# EAGLE board proto (EAGLE 5.12)
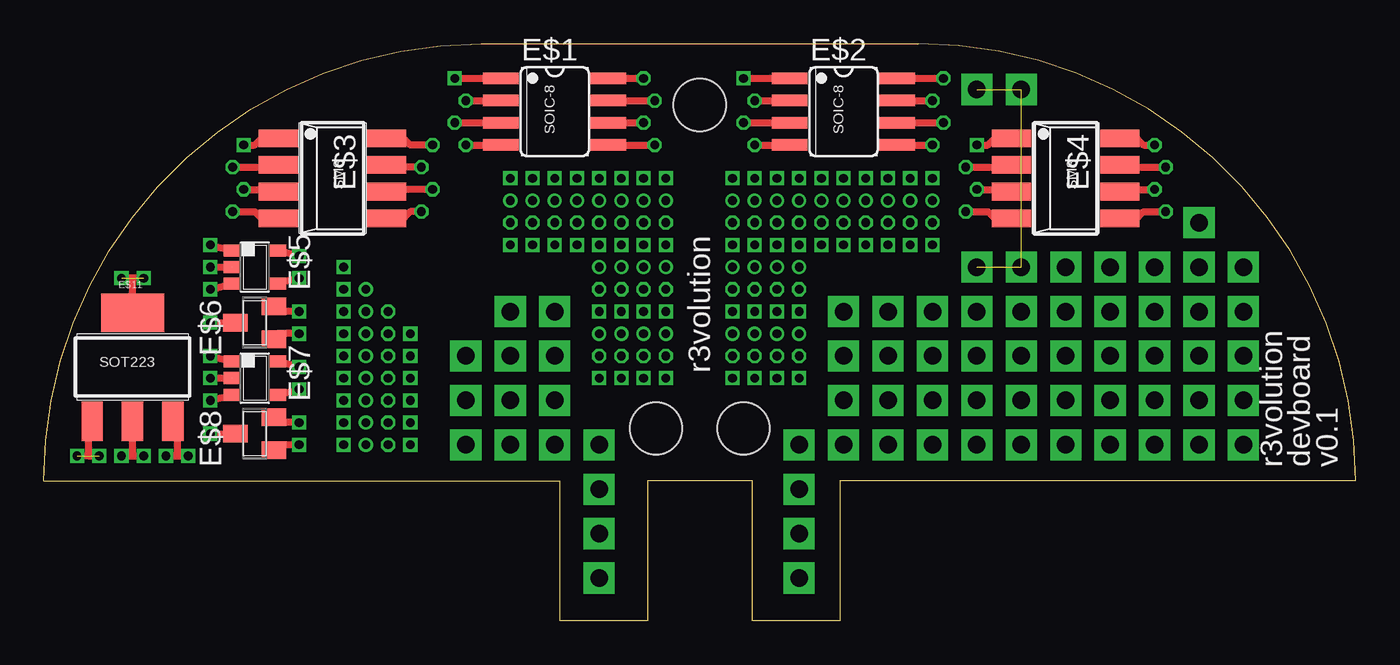
[diagram p0: board, top side]
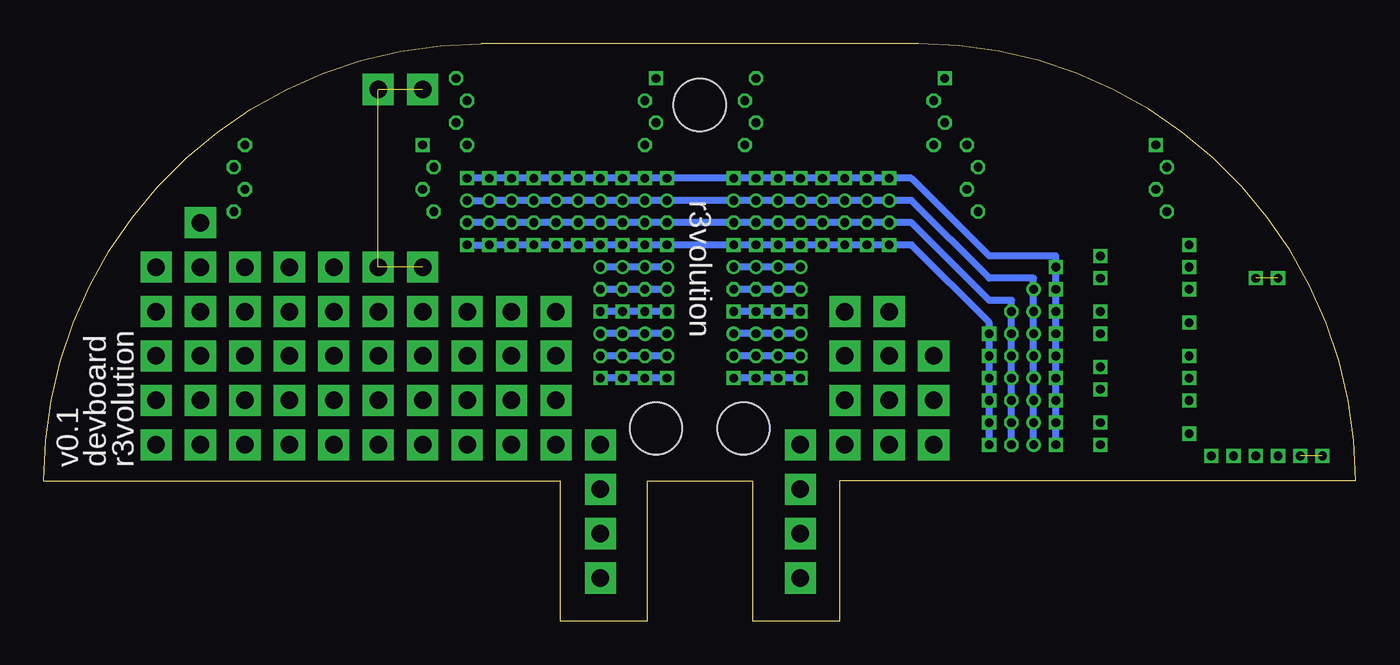
[diagram p1: board, bottom side, seen from below]

Size 75 x 33 mm. Coordinates in mm from the lower left corner, seen from the top.
Outline: 0,8 arc-90 25,33 50,33 arc-90 75,8 45.5,8 45.5,0 40.5,0 40.5,8 34.5,8 34.5,0 29.5,0 29.5,8 0,8
Copper layers (1*16): Top 0.035mm / dielectric 1.5mm / Bottom 0.035mm
Design rules "Seeed Fusion Design Rules": minimum track width 6mil, minimum drill 12mil, track to track 6mil, track to pad 6mil, pad to pad 6mil, via to via 6mil, smd to smd 0mil, copper to edge 10mil, drill to drill 10mil, minimum pad ring 10mil, minimum via ring 6mil, stop-mask expansion 2mil, vias tented up to drill 100mil, thermal gap 10mil
Holes 3 mm at 35,11 40,11 37.5,29.5

## Footprints (pad centres in the part's own frame; a part is rotated, then mirrored left to right if it is on the bottom)
SO08 = smd 0.66 x 2.032: 1 -1.905,-3.073; 2 -0.635,-3.073; 3 0.635,-3.073; 4 1.905,-3.073; 5 1.905,3.073; 6 0.635,3.073; 7 -0.635,3.073; 8 -1.905,3.073
SM8 = smd 1.016 x 2.235: 1 -2.286,-3.099; 2 -0.762,-3.099; 3 0.762,-3.099; 4 2.286,-3.099; 5 2.286,3.099; 6 0.762,3.099; 7 -0.762,3.099; 8 -2.286,3.099
DBV_R-PDSO-G5 = smd 0.69 x 0.99: 1 -0.95,-1.29; 2 0,-1.29; 3 0.95,-1.29; 4 0.95,1.3; 5 -0.95,1.3
SOT23 = smd 1 x 1.4: 1 -0.95,-1.1; 2 0.95,-1.1; 3 0,1.1
SOT223 = smd 1.219 x 2.235: 1 -2.311,-3.099; 2 0,-3.099; 3 2.311,-3.099 | smd 3.6 x 2.2: 4 0,3.099

## Placement (x,y rotation side)
E$1  [SO08]  29.21,29.11 270 top
E$2  [SO08]  45.72,29.11 270 top
E$3  [SM8]  16.51,25.3 270 top
E$4  [SM8]  58.42,25.3 270 top
E$5  [DBV_R-PDSO-G5]  12.06,20.23 270 top
E$6  [SOT23]  12.06,17.05 90 top
E$7  [DBV_R-PDSO-G5]  12.06,13.88 270 top
E$8  [SOT23]  12.06,10.7 90 top
E$11  [SOT223]  5.08,14.51 0 top

## Library data of the parts
E$1-E$4 = r3_parts
E$5 E$7 = 74xx-little-de
E$6 E$8 = transistor
E$11 = SparkFun

## Tracks (layer width: path | path; a pad name or v marks a point on that pad's centre or on a via)
S$1  (via drill 0.5)
  Top 0.406: v23.5,31.02 26.04,31.02
S$2  (via drill 0.5)
  Top 0.406: v24.13,29.75 26.04,29.75
S$3  (via drill 0.5)
  Top 0.406: v23.5,28.48 26.04,28.48
S$4  (via drill 0.5)
  Top 0.406: v24.13,27.21 26.04,27.21
S$5  (via drill 0.5)
  Top 0.406: 32.38,31.02 v34.29,31.02
S$6  (via drill 0.5)
  Top 0.406: 32.38,29.75 v34.92,29.75
S$7  (via drill 0.5)
  Top 0.406: 32.38,28.48 v34.29,28.48
S$8  (via drill 0.5)
  Top 0.406: 32.38,27.21 v34.92,27.21
S$9  (via drill 0.5)
  Top 0.406: v40.01,31.02 41.91,31.02
S$10  (via drill 0.5)
  Top 0.406: v40.64,29.75 41.91,29.75
S$11  (via drill 0.5)
  Top 0.406: v40.01,28.48 41.91,28.48
S$12  (via drill 0.5)
  Top 0.406: v40.64,27.21 41.91,27.21
S$13  (via drill 0.5)
  Top 0.406: 49.53,31.02 v51.44,31.02
S$14  (via drill 0.5)
  Top 0.406: 49.53,29.75 v50.8,29.75
S$15  (via drill 0.5)
  Top 0.406: 49.53,28.48 v51.44,28.48
S$16  (via drill 0.5)
  Top 0.406: 49.53,27.21 v50.8,27.21
S$17  (via drill 0.5)
  Top 0.406: v22.23,27.21 20.95,27.21 20.64,27.53
S$18  (via drill 0.5)
  Top 0.406: v21.59,25.94 20.32,25.94
S$19  (via drill 0.5)
  Top 0.406: v22.23,24.67 20.32,24.67
S$20  (via drill 0.5)
  Top 0.406: v21.59,23.4 20.95,23.4 20.64,23.08
S$21  (via drill 0.5)
  Top 0.406: v11.43,27.21 12.06,27.21 12.38,27.53
S$22  (via drill 0.5)
  Top 0.406: v10.79,25.94 13.34,25.94
S$23  (via drill 0.5)
  Top 0.406: v11.43,24.67 13.34,24.67
S$24  (via drill 0.5)
  Top 0.406: v10.79,23.4 12.06,23.4 12.38,23.08
S$25  (via drill 0.5)
  Top 0.406: v53.34,27.21 53.98,27.21 54.29,27.53
S$26  (via drill 0.5)
  Top 0.406: v52.7,25.94 54.61,25.94
S$27  (via drill 0.5)
  Top 0.406: v53.34,24.67 54.61,24.67
S$28  (via drill 0.5)
  Top 0.406: v52.7,23.4 53.98,23.4 54.29,23.08
S$29  (via drill 0.5)
  Top 0.406: v63.5,27.21 62.87,27.21 62.55,27.53
S$30  (via drill 0.5)
  Top 0.406: 62.23,25.94 v64.14,25.94
S$31  (via drill 0.5)
  Top 0.406: 62.23,24.67 v63.5,24.67
S$32  (via drill 0.5)
  Top 0.406: v64.14,23.4 62.87,23.4 62.55,23.08
S$33  (via drill 1 pad 1.78)
  other vias: 53.34,10.06
S$34  (via drill 1 pad 1.78)
  other vias: 53.34,12.61
S$35  (via drill 1 pad 1.78)
  other vias: 53.34,15.14
S$36  (via drill 1 pad 1.78)
  other vias: 53.34,17.68
S$37  (via drill 0.5)
  Bottom 0.406: v31.75,15.14 v33.02,15.14 v34.29,15.14 v35.56,15.14
S$38  (via drill 0.5)
  Top 0.406: 13.34,12.92 v14.61,13.24
S$39  (via drill 0.5)
  Top 0.406: v14.61,14.51 13.34,14.83
S$40  (via drill 0.5)
  Top 0.406: v9.53,15.14 10.79,14.83
S$41  (via drill 1 pad 1.78)
  other vias: 50.8,17.68
S$42  (via drill 0.5)
  Top 0.406: 5.08,11.34 5.08,9.43 v5.71,9.43 v4.45,9.43
S$43  (via drill 1 pad 1.78)
  other vias: 50.8,15.14
S$44  (via drill 1 pad 1.78)
  other vias: 50.8,12.61
S$45  (via drill 0.5)
  Top 0.406: v9.53,12.61 10.79,12.92
S$46  (via drill 0.5)
  Top 0.406: v9.53,13.88 10.79,13.88
S$47  (via drill 0.5)  (1 unrouted)
  Top 0.406: 5.08,18.32 5.08,19.59 v5.71,19.59 v4.45,19.59
S$48  (via drill 0.5)  (1 unrouted)
  Top 0.406: 2.54,11.34 2.54,9.43 v3.17,9.43 v1.91,9.43
S$49  (via drill 0.5)
  Top 0.406: 7.62,11.34 7.62,9.43 v6.99,9.43 v8.26,9.43
S$117  (via drill 0.5)
  Bottom 0.406: v17.14,10.06 v17.14,11.34 v17.14,12.61 v17.14,13.88 v17.14,15.14 v17.14,16.41 v17.14,20.23 17.14,20.86 20.95,20.86 25.4,25.3 v49.53,25.3 v50.8,25.3
S$118  (via drill 1 pad 1.78)
  other vias: 50.8,10.06
S$119  (via drill 1 pad 1.78)
  other vias: 48.26,10.06
S$120  (via drill 0.5)
  other vias: 26.67,22.77
S$121  (via drill 0.5)
  other vias: 27.94,22.77
S$122  (via drill 0.5)
  other vias: 29.21,22.77
S$123  (via drill 0.5)
  other vias: 30.48,22.77
S$124  (via drill 0.5)
  other vias: 31.75,22.77
S$125  (via drill 0.5)
  other vias: 33.02,22.77
S$126  (via drill 0.5)
  other vias: 34.29,22.77
S$127  (via drill 0.5)
  other vias: 35.56,22.77
S$129  (via drill 0.5)
  other vias: 26.67,24.04
S$130  (via drill 0.5)
  other vias: 26.67,25.3
S$131  (via drill 0.5)
  other vias: 27.94,25.3
S$132  (via drill 0.5)
  other vias: 27.94,24.04
S$133  (via drill 0.5)
  other vias: 29.21,24.04
S$134  (via drill 0.5)
  other vias: 29.21,25.3
S$135  (via drill 0.5)
  other vias: 30.48,25.3
S$136  (via drill 0.5)
  other vias: 30.48,24.04
S$137  (via drill 0.5)
  other vias: 31.75,24.04
S$138  (via drill 0.5)
  other vias: 31.75,25.3
S$139  (via drill 0.5)
  other vias: 33.02,25.3
S$140  (via drill 0.5)
  other vias: 33.02,24.04
S$141  (via drill 0.5)
  other vias: 34.29,25.3
S$142  (via drill 0.5)
  other vias: 34.29,24.04
S$143  (via drill 0.5)
  other vias: 35.56,25.3
S$144  (via drill 0.5)
  other vias: 35.56,24.04
S$150  (via drill 0.5)
  other vias: 39.37,25.3
S$151  (via drill 0.5)
  other vias: 39.37,24.04
S$152  (via drill 0.5)
  other vias: 39.37,22.77
S$153  (via drill 0.5)
  other vias: 40.64,25.3
S$154  (via drill 0.5)
  other vias: 40.64,24.04
S$155  (via drill 0.5)
  other vias: 40.64,22.77
S$156  (via drill 1 pad 1.78)
  other vias: 48.26,12.61
S$157  (via drill 0.5)
  Bottom 0.406: v18.41,10.06 v18.41,11.34 v18.41,12.61 v18.41,13.88 v18.41,15.14 v18.41,16.41 v18.41,18.95 18.41,19.59 20.95,19.59 25.4,24.04 v41.91,24.04 v49.53,24.04 v50.8,24.04
S$158  (via drill 0.5)
  other vias: 41.91,25.3
S$159  (via drill 0.5)
  other vias: 43.18,25.3
S$160  (via drill 0.5)
  other vias: 43.18,24.04
S$161  (via drill 0.5)
  other vias: 43.18,22.77
S$162  (via drill 0.5)
  other vias: 44.45,24.04
S$163  (via drill 0.5)
  other vias: 44.45,25.3
S$164  (via drill 0.5)
  other vias: 44.45,22.77
S$165  (via drill 0.5)
  other vias: 45.72,25.3
S$166  (via drill 0.5)
  other vias: 45.72,24.04
S$167  (via drill 0.5)
  other vias: 45.72,22.77
S$168  (via drill 0.5)
  other vias: 46.99,22.77
S$169  (via drill 0.5)
  other vias: 46.99,24.04
S$170  (via drill 0.5)
  other vias: 46.99,25.3
S$171  (via drill 0.5)
  other vias: 48.26,25.3
S$172  (via drill 1 pad 1.78)
  other vias: 48.26,15.14
S$179  (via drill 1 pad 1.78)
  other vias: 48.26,17.68
S$180  (via drill 0.5)
  other vias: 48.26,24.04
S$181  (via drill 0.5)
  other vias: 48.26,22.77
S$182  (via drill 0.5)
  Bottom 0.406: v19.68,10.06 v19.68,11.34 v19.68,12.61 v19.68,13.88 v19.68,15.14 v19.68,16.41 v19.68,17.68 19.68,18.32 20.95,18.32 25.4,22.77 v41.91,22.77 v49.53,22.77 v50.8,22.77
S$183  (via drill 0.5)
  Bottom 0.406: v31.75,20.23 v33.02,20.23 v34.29,20.23 v35.56,20.23
S$184  (via drill 0.5)
  Bottom 0.406: v31.75,18.95 v33.02,18.95 v34.29,18.95 v35.56,18.95
S$185  (via drill 0.5)
  Bottom 0.406: v31.75,17.68 v33.02,17.68 v34.29,17.68 v35.56,17.68
S$186  (via drill 0.5)
  Bottom 0.406: v31.75,16.41 v33.02,16.41 v34.29,16.41 v35.56,16.41
S$188  (via drill 0.5)
  Bottom 0.406: v31.75,13.88 v33.02,13.88 v34.29,13.88 v35.56,13.88
S$189  (via drill 1 pad 1.78)
  other vias: 45.72,17.68
S$190  (via drill 1 pad 1.78)
  other vias: 45.72,15.14
S$191  (via drill 1 pad 1.78)
  other vias: 45.72,12.61
S$192  (via drill 1 pad 1.78)
  other vias: 45.72,10.06
S$197  (via drill 0.5)
  Bottom 0.406: v20.95,10.06 v20.95,11.34 v20.95,12.61 v20.95,13.88 v20.95,15.14 v20.95,16.41 20.95,17.05 25.4,21.5 v49.53,21.5 v50.8,21.5
S$199  (via drill 0.5)
  Top 0.406: v14.61,19.59 13.34,19.27
S$200  (via drill 1 pad 1.78)
  other vias: 43.18,10.06
S$201  (via drill 1 pad 1.78)
  other vias: 43.18,7.53
S$202  (via drill 1 pad 1.78)
  other vias: 43.18,4.99
S$203  (via drill 1 pad 1.78)
  other vias: 43.18,2.45
S$206  (via drill 1 pad 1.78)
  other vias: 29.21,17.68
S$207  (via drill 1 pad 1.78)
  other vias: 29.21,15.14
S$208  (via drill 1 pad 1.78)
  other vias: 29.21,12.61
S$209  (via drill 0.5)
  other vias: 48.26,21.5
S$210  (via drill 1 pad 1.78)
  other vias: 31.75,10.06
S$211  (via drill 1 pad 1.78)
  other vias: 29.21,10.06
S$212  (via drill 1 pad 1.78)
  other vias: 31.75,7.53
S$213  (via drill 1 pad 1.78)
  other vias: 31.75,4.99
S$214  (via drill 1 pad 1.78)
  other vias: 31.75,2.45
S$216  (via drill 1 pad 1.78)
  other vias: 26.67,10.06
S$217  (via drill 1 pad 1.78)
  other vias: 26.67,12.61
S$218  (via drill 1 pad 1.78)
  other vias: 26.67,15.14
S$219  (via drill 1 pad 1.78)
  other vias: 26.67,17.68
S$221  (via drill 0.5)
  Top 0.406: v14.61,20.86 13.34,21.18
S$223  (via drill 0.5)
  Top 0.406: v9.53,21.5 10.79,21.18
S$224  (via drill 0.5)
  Top 0.406: v9.53,18.95 10.79,19.27
S$225  (via drill 0.5)
  Top 0.406: v9.53,20.23 10.79,20.23
S$226  (via drill 1 pad 1.78)
  other vias: 24.13,15.14
S$227  (via drill 1 pad 1.78)
  other vias: 24.13,12.61
S$228  (via drill 1 pad 1.78)
  other vias: 24.13,10.06
S$234  (via drill 0.5)
  Bottom 0.406: v39.37,13.88 v40.64,13.88 v41.91,13.88 v43.18,13.88
S$235  (via drill 0.5)
  Bottom 0.406: v39.37,15.14 v40.64,15.14 v41.91,15.14 v43.18,15.14
S$236  (via drill 0.5)
  Bottom 0.406: v39.37,16.41 v40.64,16.41 v41.91,16.41 v43.18,16.41
S$237  (via drill 0.5)
  Bottom 0.406: v39.37,17.68 v40.64,17.68 v41.91,17.68 v43.18,17.68
S$238  (via drill 0.5)
  Bottom 0.406: v39.37,18.95 v40.64,18.95 v41.91,18.95 v43.18,18.95
S$239  (via drill 0.5)
  Bottom 0.406: v39.37,20.23 v40.64,20.23 v41.91,20.23 v43.18,20.23
S$245  (via drill 0.5)
  Top 0.406: v14.61,17.68 13.34,17.68
S$246  (via drill 0.5)
  Top 0.406: v9.53,17.05 10.79,17.05
S$247  (via drill 0.5)
  Top 0.406: v14.61,16.41 13.34,16.41
S$250  (via drill 0.5)
  Top 0.406: v14.61,11.34 13.34,11.34
S$251  (via drill 0.5)
  Top 0.406: v14.61,10.06 13.34,10.06
S$253  (via drill 0.5)
  Top 0.406: v9.53,10.7 11.43,10.7
S$264  (via drill 0.5)
  other vias: 46.99,21.5
S$265  (via drill 0.5)
  other vias: 45.72,21.5
S$268  (via drill 0.5)
  other vias: 44.45,21.5
S$269  (via drill 0.5)
  other vias: 17.14,18.95
S$270  (via drill 0.5)
  other vias: 17.14,17.68
S$271  (via drill 0.5)
  other vias: 18.41,17.68
S$272  (via drill 0.5)
  other vias: 43.18,21.5
S$273  (via drill 0.5)
  other vias: 41.91,21.5
S$274  (via drill 0.5)
  other vias: 40.64,21.5
S$275  (via drill 0.5)
  other vias: 39.37,21.5
S$276  (via drill 0.5)
  other vias: 35.56,21.5
S$277  (via drill 0.5)
  other vias: 34.29,21.5
S$278  (via drill 0.5)
  other vias: 33.02,21.5
S$279  (via drill 0.5)
  other vias: 31.75,21.5
S$280  (via drill 0.5)
  other vias: 30.48,21.5
S$281  (via drill 0.5)
  other vias: 29.21,21.5
S$282  (via drill 0.5)
  other vias: 27.94,21.5
S$283  (via drill 0.5)
  other vias: 26.67,21.5
S$338  (via drill 1 pad 1.78)
  other vias: 55.88,10.06
S$339  (via drill 1 pad 1.78)
  other vias: 55.88,12.61
S$340  (via drill 1 pad 1.78)
  other vias: 55.88,15.14
S$341  (via drill 1 pad 1.78)
  other vias: 55.88,17.68
S$342  (via drill 1 pad 1.78)  (3 unrouted)
  other vias: 55.88,20.23 53.34,20.23 55.88,30.38 53.34,30.38
S$343  (via drill 1 pad 1.78)
  other vias: 58.42,20.23
S$344  (via drill 1 pad 1.78)
  other vias: 58.42,17.68
S$345  (via drill 1 pad 1.78)
  other vias: 58.42,15.14
S$346  (via drill 1 pad 1.78)
  other vias: 58.42,12.61
S$347  (via drill 1 pad 1.78)
  other vias: 58.42,10.06
S$348  (via drill 1 pad 1.78)
  other vias: 60.96,20.23
S$349  (via drill 1 pad 1.78)
  other vias: 60.96,17.68
S$350  (via drill 1 pad 1.78)
  other vias: 60.96,15.14
S$351  (via drill 1 pad 1.78)
  other vias: 60.96,12.61
S$352  (via drill 1 pad 1.78)
  other vias: 60.96,10.06
S$353  (via drill 1 pad 1.78)
  other vias: 63.5,10.06
S$354  (via drill 1 pad 1.78)
  other vias: 63.5,12.61
S$355  (via drill 1 pad 1.78)
  other vias: 63.5,15.14
S$356  (via drill 1 pad 1.78)
  other vias: 63.5,17.68
S$357  (via drill 1 pad 1.78)
  other vias: 63.5,20.23
S$358  (via drill 1 pad 1.78)
  other vias: 66.04,20.23
S$359  (via drill 1 pad 1.78)
  other vias: 66.04,17.68
S$360  (via drill 1 pad 1.78)
  other vias: 66.04,15.14
S$361  (via drill 1 pad 1.78)
  other vias: 66.04,12.61
S$362  (via drill 1 pad 1.78)
  other vias: 66.04,10.06
S$363  (via drill 1 pad 1.78)
  other vias: 68.58,10.06
S$364  (via drill 1 pad 1.78)
  other vias: 68.58,12.61
S$365  (via drill 1 pad 1.78)
  other vias: 68.58,15.14
S$366  (via drill 1 pad 1.78)
  other vias: 68.58,17.68
S$367  (via drill 1 pad 1.78)
  other vias: 68.58,20.23
S$373  (via drill 1 pad 1.78)
  other vias: 66.04,22.77

## Text on the board
_tsilk: SOIC-8 | SOIC-8 | SM8 | SM8 | SOT223 | r3volution | r3volution | devboard | v0.1
_bsilk: r3volution | r3volution | devboard | v0.1